# Altium PCB jetson_nano_breakout.PcbDoc
Units mil, origin at the board's own origin, x right, y up, seen from the top; angles counter-clockwise.
Board outline 2050 x 1337.5 mil, 2 copper layers (Top Layer, Bottom Layer); 35 components, 47 nets, 177 pads, 37 vias.
Unrouted connection lines stored in the file: 8.
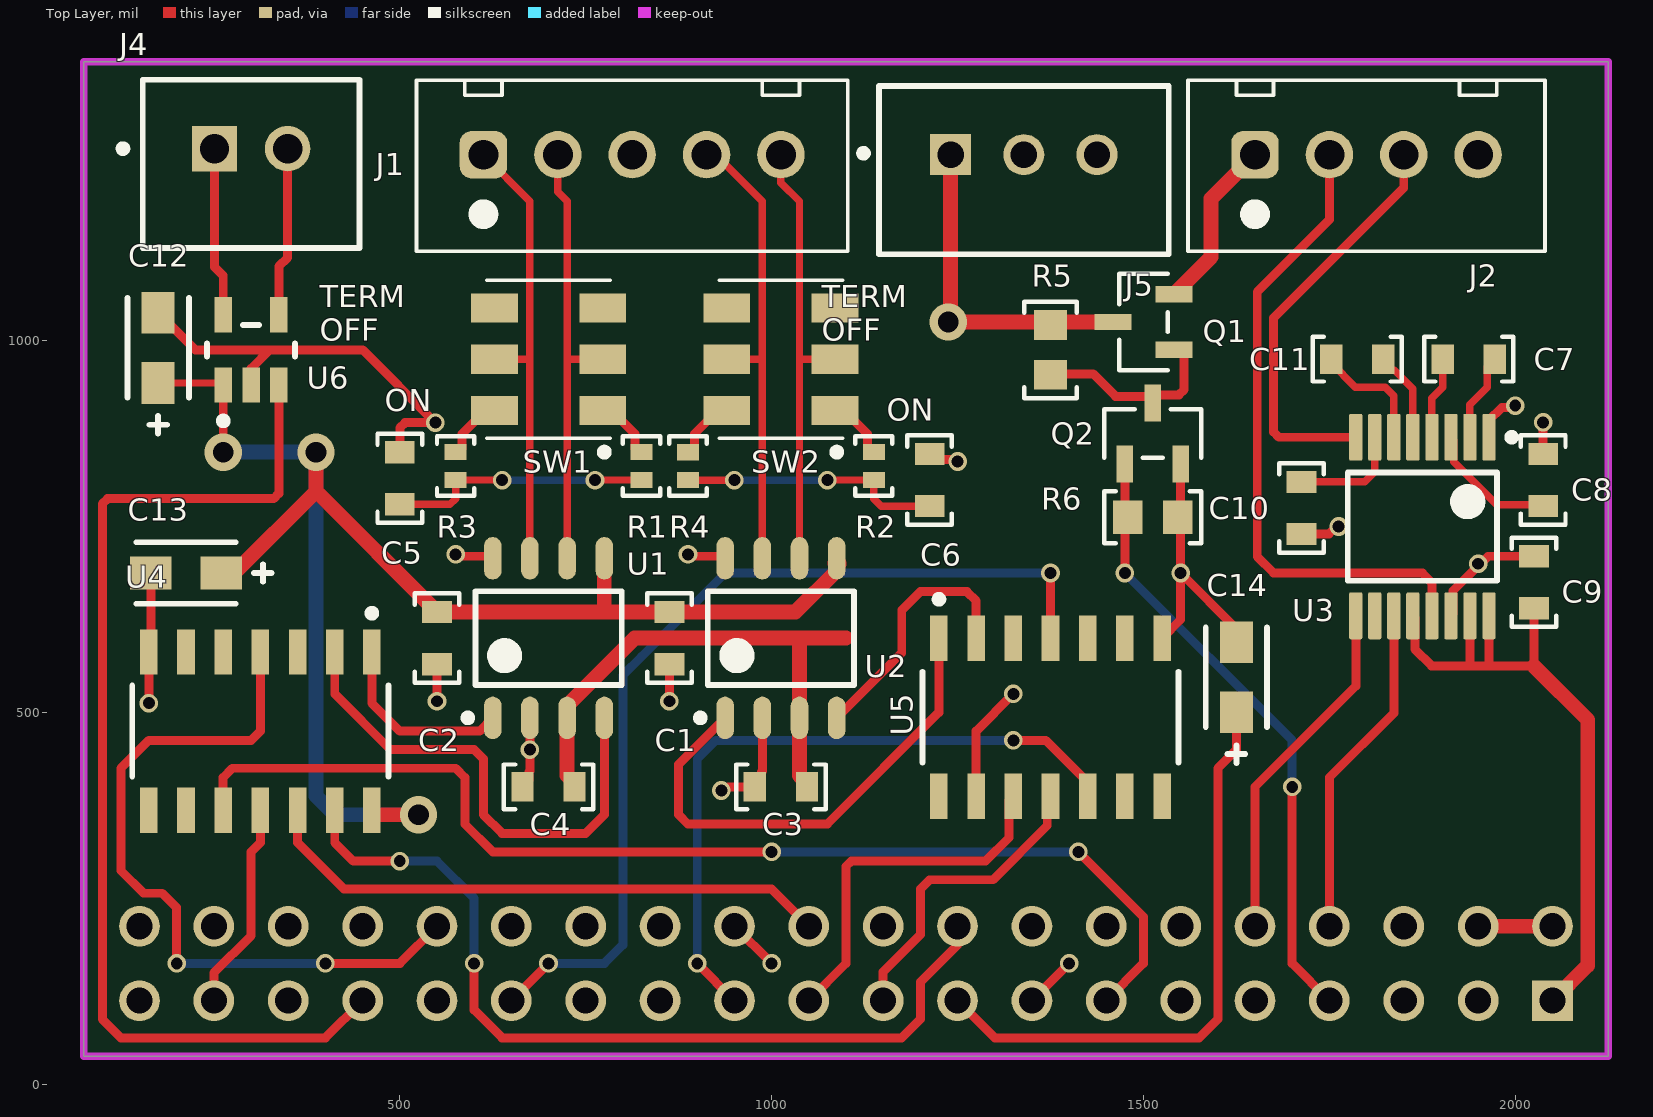
[diagram p0: Top Layer view]
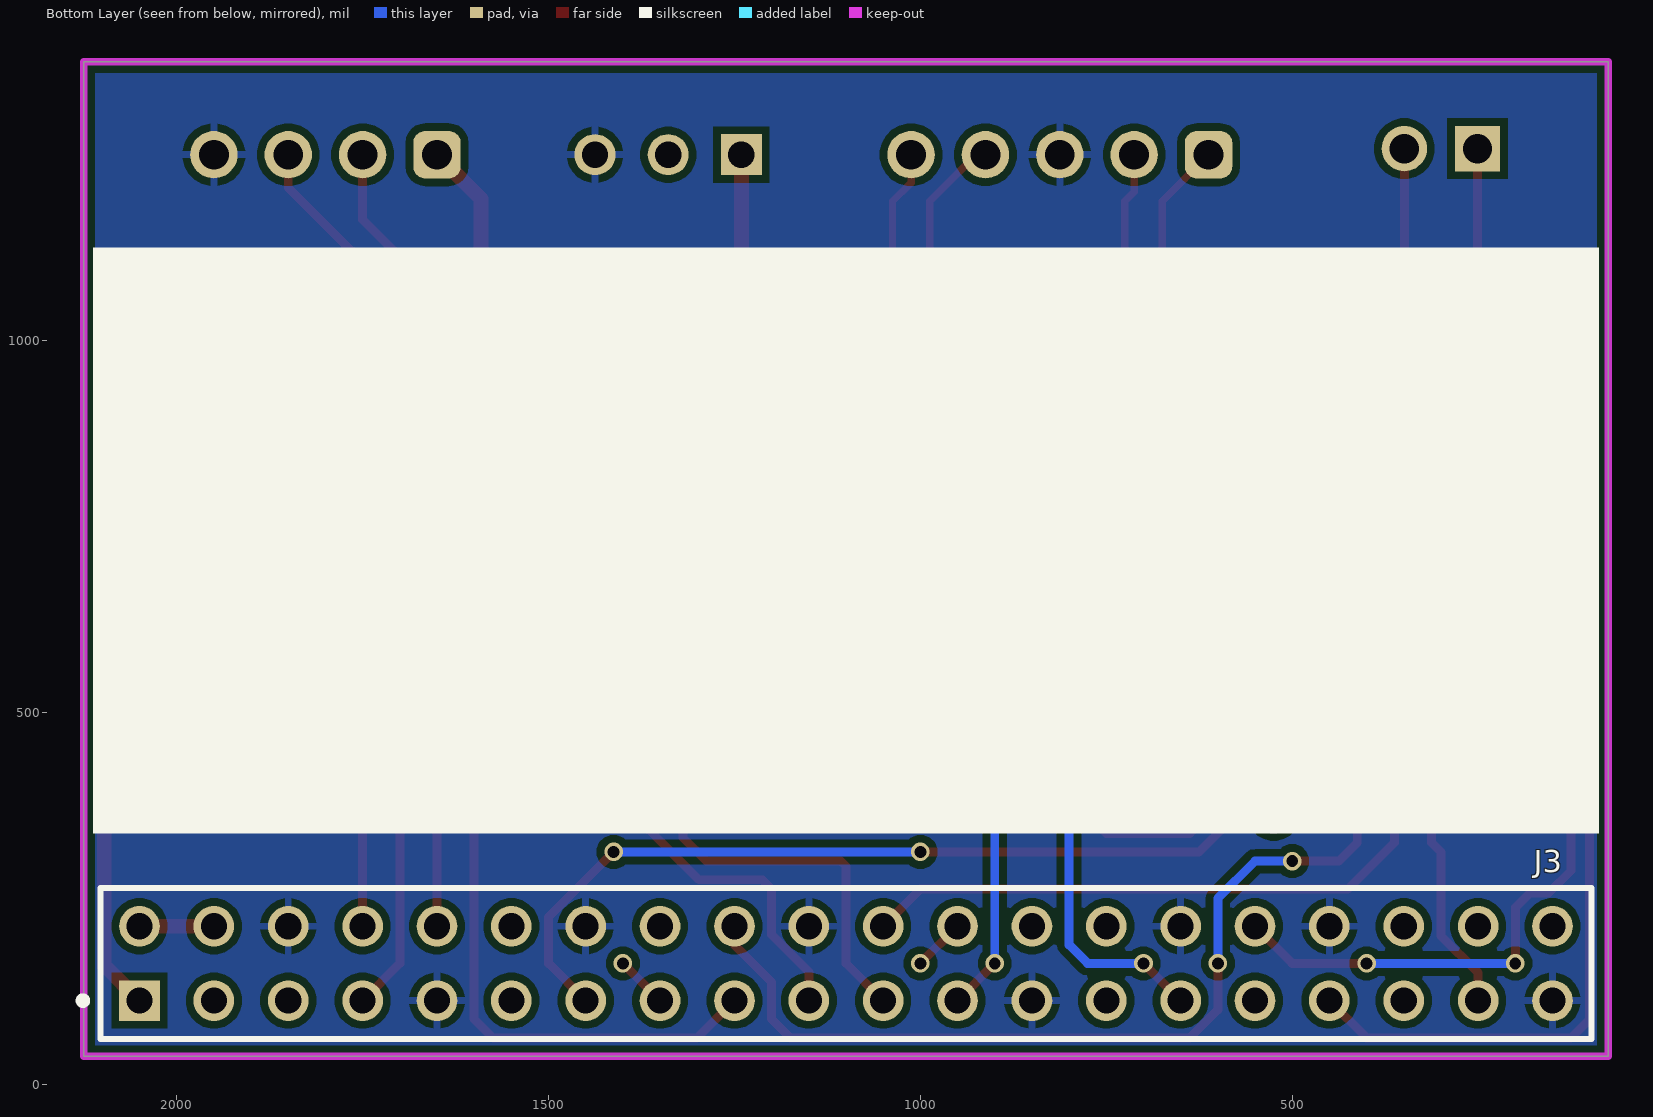
[diagram p1: Bottom Layer view, seen from below]
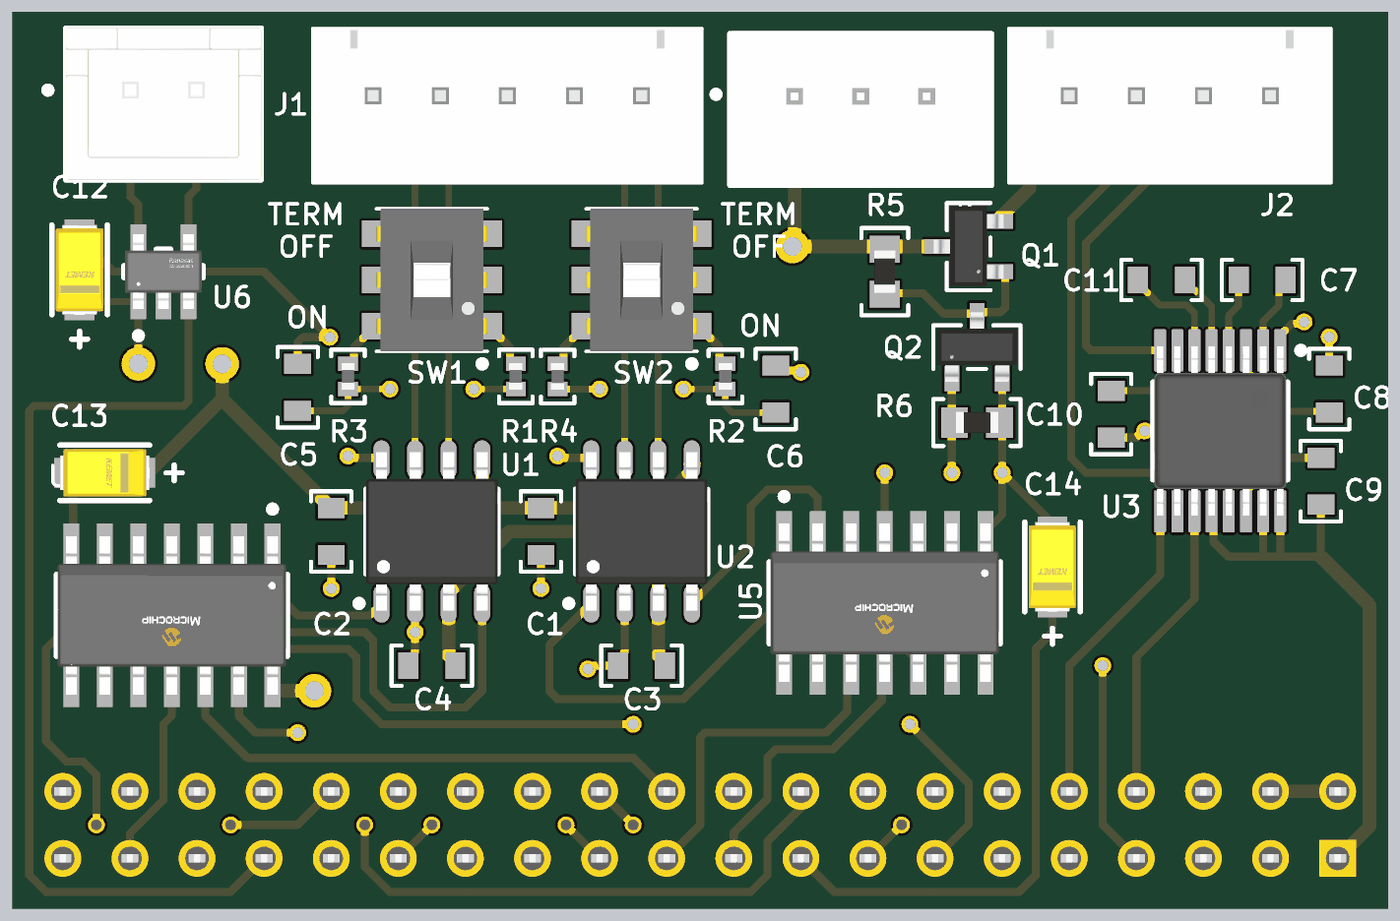
[diagram p2: 3D render of the assembled board from above, using the file's embedded part models]

## Layer stack, top to bottom
Top Solder: solder mask 0.4, Solder Resist, Dk 3.5
Top Layer: signal copper 1.4
Dielectric 1: dielectric 12.6, FR-4, Dk 4.8
Bottom Layer: signal copper 1.4
Bottom Solder: solder mask 0.4, Solder Resist, Dk 3.5

## Board outline
75,37.5 75,1375 2125,1375 2125,37.5

## Design rules (kind name [scope] priority, off if disabled: settings)
Clearance [All] p1: gap=10 ignorepadtopadclearanceinfootprint=FALSE except(0: Arc-Hole Track-Hole SMDPad-Hole THPad-Hole Via-Hole Fill-Hole Poly-Hole Region-Hole Text-Hole; 6: Arc-SMDPad Track-SMDPad SMDPad-SMDPad SMDPad-THPad SMDPad-Via SMDPad-Fill SMDPad-Poly SMDPad-Region)
MinimumSolderMaskSliver [All] p1: minsoldermaskwidth=7
PolygonConnect [All] p1: connectstyle=Relief reliefconductorwidth=10 reliefentries=4 polygonreliefangle="90 Angle" airgapwidth=10
RoomDefinition jetson_nano_breakout [InComponentClass('jetson_nano_breakout')] p1: confinementstyle=ConfineIn formatcopy=TRUE lockcomponents=FALSE outline 2175,112.5 4112.5,112.5 4112.5,625 2175,625
RoutingVias [All] p1: holewidth=16 width=25 viastyle="Through Hole" minholewidth=16 minwidth=20 maxholewidth=28 maxwidth=50
SilkToSolderMaskClearance [IsPad] p1: minsilkscreentomaskgap=5 clearancetoexposedcopper=TRUE
SolderMaskExpansion [All] p1: expansion=4 istentingtop=FALSE
SupplyNets "Schematic Supply Nets_2" [InNet('3v3')] p1: voltage=0.000
SupplyNets "Schematic Supply Nets_1" [InNet('+5')] p2: voltage=0.000
SupplyNets "Schematic Supply Nets" [InNet('GND')] p3: voltage=0.000
Width [All] p1: maxlimit=50 minlimit=10 preferedwidth=10
28 further rules are at their usual default settings.

## Components (designator, comment, footprint, x,y, rotation, side; value= is the part's Value field where it differs from the comment)
C1 "1uF Ceramic 16V" CAPACITOR_0603 862.5,600 r270 top value=1uF
C2 "1uF Ceramic 16V" CAPACITOR_0603 550,600 r270 top value=1uF
C3 "10uF Ceramic 6.3V" CAPACITOR_0603 1012.5,400 r180 top
C4 "10uF Ceramic 6.3V" CAPACITOR_0603 700,400 r180 top
C5 "10nF Ceramic 6.3V" CAPACITOR_0603 500,815 r270 top value=10nF
C6 "10nF Ceramic 6.3V" CAPACITOR_0603 1212.5,812.5 r270 top value=10nF
C7 "100nF Ceramic 6.3V" CAPACITOR_0603 1937.5,975 r180 top value=0.1uF
C8 "100nF Ceramic 6.3V" CAPACITOR_0603 2037.5,812.5 r90 top value=0.1uF
C9 "100nF Ceramic 6.3V" CAPACITOR_0603 2025,675 r90 top value=0.1uF
C10 "100nF Ceramic 6.3V" CAPACITOR_0603 1712.5,775 r270 top value=0.1uF
C11 "100nF Ceramic 6.3V" CAPACITOR_0603 1787.5,975 r180 top value=0.1uF
C12 "T491A104K035AT" FP-T491A104K035AT-MFG 175,990.26 r270 top
C13 "T491A104K035AT" FP-T491A104K035AT-MFG 212.5,687.5 r0 top
C14 "T491A104K035AT" FP-T491A104K035AT-MFG 1625,547.24 r270 top
J1 "XH2.54 VERT" CONN_JST_XH254_5POS_VERT 612.5,1250 r0 top
J2 "XH2.54 VERT" CONN_JST_XH254_4POS_VERT 1650,1250 r0 top
J3 "7-534206-0" FP-7-534206-0-MFG 1100,162.5 r180 bottom
J4 "B2B-XH-A(LF)(SN)" FP-B2B-XH-A_LF_SN-MFG 300,1237.5 r0 top
J5 "B3B-XH-A(LF)(SN)" FP-B3B-XH-A_LF_SN-MFG 1339.07,1229.33 r0 top
Q1 "MOSFET N-CH 30V 5.8A SOT-23-3" SOT-23-3 1500,1025 r90 top
Q2 "MOSFET N-CH 30V 5.8A SOT-23-3" SOT-23-3 1512.5,875 r0 top
R1 "60.4 Ohm 1% 1/16W" RESISTOR_0402 825,831.3 r270 top
R2 "60.4 Ohm 1% 1/16W" RESISTOR_0402 1137.5,831.3 r270 top
R3 "60.4 Ohm 1% 1/16W" RESISTOR_0402 575,831.3 r270 top
R4 "60.4 Ohm 1% 1/16W" RESISTOR_0402 887.5,831.2 r270 top
R5 "10k Ohm 5% 1/10W" RESISTOR_0603 1375,987.5 r270 top
R6 "10k Ohm 5% 1/10W" RESISTOR_0603 1512.5,762.5 r0 top
SW1 "Switch DPDT" CAS-220TA 700,975 r90 top
SW2 "Switch DPDT" CAS-220TA 1012.5,975 r90 top
U1 "CAN Transceiver" SOIC-8 700,600 r90 top
U2 "CAN Transceiver" SOIC-8 1012.5,600 r90 top
U3 "SN65C3221EPWR" PW0016A_M 1875,750 r270 top
U4 "MCP2517FD-H/SL" FP-C04-065-SL-MFG#1 312.5,475 r270 top
U5 "MCP2517FD-H/SL" FP-C04-065-SL-MFG#2 1375,493.7 r270 top
U6 "ISL3280EIHZ-T" FP-P5_064-MFG 300,987.5 r90 top

## Footprints (in the part's own frame and the unit in brackets; to place one, negate y for a bottom-side part, rotate by r counter-clockwise, add the part's x,y. Pads: shape width x height; smd on the part's side, far side on the other; paste and mask are expansions set on the pad)
CAPACITOR_0603 [mil] "CAPACITOR 0603"
  rect 30x40 smd: 1(-35,0) 2(35,0)
  silkscreen extent -60,-30 60,30, body extent -31,-16 32,16, height 31
CAS-220TA [mm] "SWITCH SLIDE DPDT 100MA 6V"
  rrect0% 1x1.6 smd: 1(-1.75,-1.85) 2(0,-1.85) 3(1.75,-1.85) 4(-1.75,1.85) 5(0,1.85) 6(1.75,1.85)
  silkscreen extent -3.3,-2.1 2.7,2.1, body extent -2.7,-2.1 2.7,2.1, height 2.51
CONN_JST_XH254_4POS_VERT [mm] "JST XH 2.54mm Pitch 4 Pos Vertical"
  rrect50% 1.62x1.62 hole 1.02: 1(0,0)
  round 1.62 hole 1.02: 2(2.54,0) 3(5.08,0) 4(7.62,0)
  silkscreen extent -2.29,-3.3 9.91,2.54, body extent -2.34,-3.35 9.96,2.49, height 7.21
CONN_JST_XH254_5POS_VERT [mm] "JST XH 2.54mm Pitch 5 Pos Vertical"
  rrect50% 1.62x1.62 hole 1.02: 1(0,0)
  round 1.62 hole 1.02: 2(2.54,0) 3(5.08,0) 4(7.62,0) 5(10.16,0)
  silkscreen extent -2.29,-3.3 12.45,2.54, body extent -2.34,-3.35 12.5,2.49, height 7.21
FP-7-534206-0-MFG [mm]
  rect 1.39x1.39 hole 0.89 paste-2539.97 mask+0: 1(-24.13,-1.27)
  round 1.39 hole 0.89 paste-2539.97 mask+0: 2(-24.13,1.27) 3(-21.59,-1.27) 4(-21.59,1.27) 5(-19.05,-1.27) 6(-19.05,1.27) 7(-16.51,-1.27) 8(-16.51,1.27) 9(-13.97,-1.27) 10(-13.97,1.27) 11(-11.43,-1.27) 12(-11.43,1.27) 13(-8.89,-1.27) 14(-8.89,1.27) 15(-6.35,-1.27) 16(-6.35,1.27) 17(-3.81,-1.27) 18(-3.81,1.27) 19(-1.27,-1.27) 20(-1.27,1.27) 21(1.27,-1.27) 22(1.27,1.27) 23(3.81,-1.27) 24(3.81,1.27) 25(6.35,-1.27) 26(6.35,1.27) 27(8.89,-1.27) 28(8.89,1.27) 29(11.43,-1.27) 30(11.43,1.27) 31(13.97,-1.27) 32(13.97,1.27) 33(16.51,-1.27) 34(16.51,1.27) 35(19.05,-1.27) 36(19.05,1.27) 37(21.59,-1.27) 38(21.59,1.27) 39(24.13,-1.27) 40(24.13,1.27)
  silkscreen extent -26.19,-2.58 25.47,2.58, body extent -25.4,-2.51 25.4,2.51, height 8.64
FP-B2B-XH-A_LF_SN-MFG [mm]
  rect 1.55x1.55 hole 1 paste-2539.97 mask+0: 1(-1.25,0.525)
  round 1.55 hole 1 paste-2539.97 mask+0: 2(1.25,0.525)
  silkscreen extent -4.5,-2.88 3.7,2.88, body extent -3.8,-2.98 3.8,2.98, height 0.25
FP-B3B-XH-A_LF_SN-MFG [mm]
  rect 1.4x1.4 hole 0.9 paste-2539.97 mask+0: 1(-2.5,0.525)
  round 1.4 hole 0.9 paste-2539.97 mask+0: 2(0,0.525) 3(2.5,0.525)
  silkscreen extent -5.6,-2.88 4.95,2.88, body extent -4.95,-2.88 4.95,2.89, height 7
FP-C04-065-SL-MFG#1 [mm]
  rect 1.55x0.6 smd paste+0 mask+0: 1(-2.7,3.81) 2(-2.7,2.54) 3(-2.7,1.27) 4(-2.7,0) 5(-2.7,-1.27) 6(-2.7,-2.54) 7(-2.7,-3.81) 8(2.7,-3.81) 9(2.7,-2.54) 10(2.7,-1.27) 11(2.7,0) 12(2.7,1.27) 13(2.7,2.54) 14(2.7,3.81)
  silkscreen extent -4.15,-4.38 1.55,4.38, body extent -3.57,-4.62 3.57,4.62, height 0.25
FP-C04-065-SL-MFG#2 [mm]
  rect 1.55x0.6 smd paste+0 mask+0: 1(-2.7,-3.81) 2(-2.7,-2.54) 3(-2.7,-1.27) 4(-2.7,0) 5(-2.7,1.27) 6(-2.7,2.54) 7(-2.7,3.81) 8(2.7,3.81) 9(2.7,2.54) 10(2.7,1.27) 11(2.7,0) 12(2.7,-1.27) 13(2.7,-2.54) 14(2.7,-3.81)
  silkscreen extent -4.15,-4.38 1.55,4.38, body extent -3,-4.33 3,4.33, height 1.75
FP-P5_064-MFG [mm]
  rect 1.2x0.6 smd paste+0 mask+0: 1(-1.2,0.95) 2(-1.2,0) 3(-1.2,-0.95) 4(1.2,-0.95) 5(1.2,0.95)
  silkscreen extent -2.55,-1.5 0.85,1.5, body extent -1.9,-1.6 1.9,1.6, height 0.25
FP-T491A104K035AT-MFG [mm]
  rect 1.42x1.13 smd paste+0 mask+0: 1(-1.2,0) 2(1.2,0)
  silkscreen extent -1.7,-1.05 2.93,1.05, body extent -2.03,-1.02 2.03,1.02, height 0.25
PW0016A_M [mm] "SOP, 16-Leads, Body 5.1x4.5mm, Pitch 0.65mm, IPC Low Density"
  rrect22% 1.6x0.45 smd: 1(-3.05,2.275) 2(-3.05,1.625) 3(-3.05,0.975) 4(-3.05,0.325) 5(-3.05,-0.325) 6(-3.05,-0.975) 7(-3.05,-1.625) 8(-3.05,-2.275) 9(3.05,-2.275) 10(3.05,-1.625) 11(3.05,-0.975) 12(3.05,-0.325) 13(3.05,0.325) 14(3.05,0.975) 15(3.05,1.625) 16(3.05,2.275)
  silkscreen extent -3.17,-2.55 1.85,3.17, body extent -3.21,-2.5 3.21,2.5, height 1
RESISTOR_0402 [mm] "Resistor 0402"
  rect 0.55x0.75 smd: 1(-0.475,0) 2(0.475,0)
  silkscreen extent -1.02,-0.64 1.02,0.64, body extent -0.5,-0.25 0.5,0.25, height 0.25
RESISTOR_0603 [mil] "Resistor 0603"
  rect 40x45 smd: 1(-33.5,0) 2(33.5,0)
  silkscreen extent -65,-35 65,35, body extent -31,-16 32,16, height 16
SOIC-8 [mm] "SOIC, 8-Leads, Body 4.90x3.90mm, Pitch 1.27mm, IPC Medium Density"
  oval 1.45x0.6 smd: 1(-2.725,1.905) 2(-2.725,0.635) 3(-2.725,-0.635) 4(-2.725,-1.905) 5(2.725,-1.905) 6(2.725,-0.635) 7(2.725,0.635) 8(2.725,1.905)
  silkscreen extent -2.85,-2.5 1.6,2.88, body extent -3,-2.5 3,2.5, height 1.75
SOT-23-3 [mil]
  rect 22x50 smd paste+0 mask+4: 1(-37.5,-41) 2(37.5,-41) 3(0,41)
  silkscreen extent -65,-33 65,33, body extent -60,-52 60,52, height 44

## Part data
C1 C2: library part CAPACITOR_1uF_0603, "Cap 1uF 16V +/-10% / Ceramic 0603", Supplier Part Number 1=399-7847-1-ND, Tolerance="+/- 10%", Voltage=16V, Made By="Flip B", Supplier 1=Digi-Key
C3 C4: library part CAPACITOR_10uF_0603, "Cap 10uF 6.3V +/-20% / Ceramic 0603", Supplier Part Number 1=1276-1119-1-ND, Tolerance="+/- 20%", Value (uF)="10 uF", Voltage=6.3V, ComponentLink1Description=Digikey, ComponentLink1URL=https://www.digikey.com/en/products/detail/samsung-electro-mechanics/CL10A106MQ8NNNC/3886777, Made By="Flip B", Supplier 1=Digi-Key
C5 C6: library part CAPACITOR_0.01uF_0603, "Cap 10nF 6.3V +/-20% / Ceramic 0603", Supplier Part Number 1=80-C0603C103K9R, Tolerance="+/- 10%", Voltage=6.3V, ComponentLink1Description=Datsheet, ComponentLink1URL=https://www.mouser.com/datasheet/2/212/KEM_C1002_X7R_SMD-1102033.pdf, Made By="Flip B", Supplier 1=Mouser
C7 C8 C9 C10 C11: library part CAPACITOR_0.1uF_0603, "Cap 100nF 6.3V +/-10% / Ceramic 0603", Supplier Part Number 1=399-15351-1-ND, Tolerance="+/- 10%", Voltage=6.3V, ComponentLink1Description=Datsheet, ComponentLink1URL=https://www.mouser.com/datasheet/2/212/KEM_C1002_X7R_SMD-1102033.pdf, Made By="Flip B", Supplier 1=Digi-Key
C12 C13 C14: library part CMP-03017-000018-1, "CAP TANT 0.1UF 10% 35V 1206", Capacitance=100nF, Case Code (Imperial)=1206, Case Code (Metric)=3216, Dielectric Material=Tantalum, ESR (Equivalent Series Resistance)=20R, Leakage Current=500nA, Max Operating Temperature=125°C, Min Operating Temperature=-55°C, Package Quantity=1, Ripple Current=61mA, Tolerance=10%, Voltage=35V, Case/Package=1206, Construction=Flat, Depth=1.6mm, Dissipation Factor=4%, Features="General Purpose", Height=1.6mm, Height - Seated (Max)=0.071inch, Lead Free="Lead Free", Lead Pitch=1.2mm, Length=3.2mm, Life (Hours)=2000Hour, Mount="Surface Mount", Number of Pins=2, Packaging="Tape and Reel", Polarity=Polar, Radiation Hardening=No, REACH SVHC="No SVHC", RoHS Compliant=Yes, Series=T491, Size=1.6mm, Termination=SMD/SMT, Voltage Rating=35V, Voltage Rating (DC)=35V, Weight=0.000571oz, Width=1.6mm
J1: library part CONN_JST_XH254_5POS_VERT, "JST XH 2.54mm Pitch 5 Pos Vertical", Color=White, Current Per Pin=4A, Manufacturer=JST, ComponentLink1Description="Purchase Link", ComponentLink1URL=https://www.amazon.com/460PCS-XH2-54-Connector-Terminal-Connectors/dp/B09DBGVX5C, Configuration=Vertical, Created by="Robert P", NOTE="Do not use JST 2.5mm parts with this footprint. JST does not make 2.54mm pitch pins, rather only clones make this connector!", Number of Positions=5, Pitch=2.54mm, Series="XH 2.54"
J2: library part CONN_JST_XH254_4POS_VERT, "JST XH 2.54mm Pitch 4 Pos Vertical", Color=White, Current Per Pin=4A, Manufacturer=JST, ComponentLink1Description="Purchase Link", ComponentLink1URL=https://www.amazon.com/460PCS-XH2-54-Connector-Terminal-Connectors/dp/B09DBGVX5C, Configuration=Vertical, Created by="Robert P", NOTE="Do not use JST 2.5mm parts with this footprint. JST does not make 2.54mm pitch pins, rather only clones make this connector!", Number of Positions=4, Pitch=2.54mm, Series="XH 2.54"
J3: library part CMP-03369-000068-1, "CONN RCPT 40POS 0.1 GOLD PCB", Current Rating=2A, Manufacturer="TE Connectivity", Temperature="-65°C to +105°C", Temperature Range High=+105°C, Temperature Range Low=-65°C, Voltage Rating=333V, Automotive=No, Category=Conn, ComponentLink2Description=Datasheet, ComponentLink2URL=https://octopart.com/datasheet/7-534206-0-te+connectivity-39516831, Conn Gender=Female, Conn Orientation=Vertical, Contact Material=Gold,Nickel, Device Class L1=Connectors, Device Class L2="Headers and Wire Housings", Device Class L3=unset, Digikey Description="CONN RCPT 40POS 0.1 GOLD PCB", Footprint Url=https://www.mouser.in/datasheet/2/418/NG_CD_534206_R7-1252933.pdf, Height=8.9mm, Is Female=yes, Lead Free=Yes, Manufacturer Part Number=7-534206-0, Mouser Description="Headers & Wire Housings REC 2X20P VRT T/H", Number of Contacts=40, Number of Rows=2, Octopart=https://octopart.com/7-534206-0-te+connectivity-39516831, Package=7-534206-0, Pitch=2.54mm, RoHS=TRUE, Standoff Height=0.38mm
J4: library part CMP-2000-05888-3, "CONN HEADER VERT 2POS 2.5MM", Color=Natural, Contact Resistance=20mR, Current Rating=3A, Housing Color=White, Insulation Resistance=1GR, Max Operating Temperature=85°C, Max Voltage Rating (AC)=250V, Min Operating Temperature=-25°C, Connector Type="Male Pin", Contact Material=Brass, Contact Plating=Tin, Contact Type="Male Pin", Depth=5.75mm, Fastening Type=Detent, Housing Material=Polyamide, Lead Free="Lead Free", Lead Pitch=2.5mm, Length=7.4mm, Max Current Rating=3A, Max Voltage Rating (DC)=250V, Mount="Through Hole", Number of Contacts=2, Number of Positions=2, Number of Rows=1, Orientation=Straight, Packaging=Bulk, Pitch=2.5mm, REACH SVHC="No SVHC", Series=XH, Termination=Solder, Voltage Rating=250V, Voltage Rating (AC)=250V, Wire/Cable Gauge=22AWG
J5: library part CMP-17439-000014-3, "CONN HEADER VERT 3POS 2.5MM", Color=Natural, Contact Resistance=20mR, Current Rating=3A, Flammability Rating="UL94 V-0", Housing Color=White, Insulation Resistance=1GR, Max Operating Temperature=85°C, Max Voltage Rating (AC)=250V, Min Operating Temperature=-25°C, Connector Type=Header, Contact Finish - Mating=TIN, Contact Material=Brass, Contact Plating=Tin, Contact Shape=Square, Contact Type="Male Pin", Depth=5.75mm, Fastening Type=Detent, Gender=Male, Housing Material=Polyamide, Insulation Color=Natural, Insulation Material=Nylon, Lead Free="Lead Free", Lead Pitch=2.5mm, Length=9.9mm, Max Current Rating=3A, Max Voltage Rating (DC)=250V, Mount="Through Hole", Number of Contacts=3, Number of Positions=3, Number of Rows=1, Orientation=Straight, Packaging=Bulk, Pitch=2.5mm, REACH SVHC="No SVHC", Series=XH, Termination=Solder, Voltage Rating=250V, Voltage Rating (AC)=250V, Wire/Cable Gauge=22AWG
Q1 Q2: library part AO3404A, "N-Channel 30 V 5.8A (Ta) 1.4W (Ta) Surface Mount SOT-23-3", Amp Rating="5.8 A", Package=SOT23-3L, Power Dissipation="1.4W (Ta)", Supplier Part Number 1=785-1004-1-ND, Created by="Dylan T", FET Type=N-Channel, Manufacturer _Part_Number=AO3404A, Rds (on)="28mOhm @ 5.8A, 10V", SourceLibrary=ON_Semiconductor_2020-01-13, Supplier 1=Digi-Key, Vdss=30V, Vendor="Alpha & Omega Semiconductor Inc.", Vgs (Max)="3V @ 5.8A, 10V", Vgs (th)="3V @ 250µA"
R1 R2 R3 R4: library part RESISTOR_60.4_0402, "RES 60.4 OHM 1% 1/16W 0402", Digikey Part Numer=CR0603-JW-104ELFTR-ND, Supplier Part Number 1=13-AC0402FR-0760R4LCT-ND, Tolerance="+/- 1%", Value  (Ohms)=60.4, Made By="Robert Pafford", Supplier=Digikey, Supplier 1=Digi-Key, Wattage=1/16W
R5 R6: library part RESISTOR_10K_0603, "RES 10k OHM 5% 1/10W 0603", Digikey Part Numer=CR0603-JW-104ELFTR-ND, Supplier Part Number 1=2019-RK73B1JTTD103JCT-ND, Tolerance="+/- 5%", Value  (Ohms)=10K, ComponentLink1Description=Datasheet, ComponentLink1URL=https://www.bourns.com/docs/product-datasheets/CRxxxxx.pdf, Made By="Robert Pafford", Supplier=Digikey, Supplier 1=Digi-Key, Wattage=1/8W
SW1 SW2: library part CAS-220TA_CAN_TERM, "GOLD SWITCH FLUSH SLIDE DPDT 100MA 6V", Current Rating="100 mA", Supplier Part Number 1=CAS220JCT-ND, Voltage Rating=6VDC, Contact Finish=Gold, Made By="Robert Pafford", Supplier 1=Digi-Key, Switch Function=DPDT
U1 U2: library part TJA1442AT, "CAN Interface IC High-Speed CAN Transceiver with Standby Mode", Supplier Part Number 1=771-TJA1442AT/0Z, Made By="Robert Pafford", Max Data Rate=5Mbps, Supplier 1=Mouser
U3: library part CMP-0299-01595-2, "3-V to 5.5-V Single-Channel RS-232 1-Mbit/s Line Driver / Receiver with ±15-kV IEC ESD Protection, -40 to 85 degC, 16-Pin SSOP (DB), Green (RoHS & no Sb/Br)", Drivers Per Package=1, Supply Voltage(s)(V)="3.3 or 5.0", ComponentLink1Description="Manufacturer URL", ComponentLink1URL=www.ti.com, ComponentLink2Description=Datasheet, ComponentLink2URL=http://www.ti.com/general/docs/lit/getliterature.tsp?genericPartNumber=SN65C3221E&fileType=pdf, ComponentLink3Description="Package Specification", ComponentLink3URL=http://www.ti.com/litv/pdf/mpds361, DatasheetVersion=SLLS694B, ESD HBM(kV)=+/-15, ICC(Max)(mA)=1, IEC-61000-4-2 SUPPORT=TRUE, PackageDescription="16-Pin Plastic Thin Small Outline Package 5 x 4.4 mm Body ,0.65 mm Pitch", PackageReference=PW0016A, PackageVersion="revG, Feb-2011", Receivers Per Package=1, RS-232=TRUE, Single Supply=TRUE, SubFamily=RS-232
U4 U5: library part CMP-06298-000003-1, "IC CANBUS CONTROLLER SPI 14SOIC", Ambient Temperature Range High=+150°C, Ambient Temperature Range Low=-40°C, Manufacturer=Microchip, Max Junction Temp=+165°C, Max Supply Voltage=5.5V, Min Supply Voltage=2.7V, Nominal Supply Current=15mA, Package=C04-065-SL, Temperature="-40°C to +150°C", Automotive=No, Category=IC, ComponentLink2Description=Datasheet, ComponentLink2URL=http://ww1.microchip.com/downloads/en/DeviceDoc/MCP2517FD-External-CAN-FD-Controller-with-SPI-Interface-20005688B.pdf, Device Class L1="Integrated Circuits (ICs)", Device Class L2="Interface ICs", Device Class L3=Controllers, Digikey Description="IC CANBUS CONTROLLER SPI 14SOIC", Footprint Url=http://ww1.microchip.com/downloads/en/DeviceDoc/14L%20SOIC%203_90%20mm%20%28SL%29%20C04-00065d.pdf, Function=Controller, Height=1.75mm, Interface=SPI,CAN, Ipc Land Pattern Name=SOIC127P600X175-14, Lead Free=Yes, Manufacturer Part Number=MCP2517FD-H/SL, Mouser Description="Stand-Alone Can Fd Controller w/Spi Interface, 14 Soic .150in Tube", Octopart=https://octopart.com/mcp2517fd-h%2Fsl-microchip-83497369, RoHS=TRUE, Standoff Height=0.1mm, Temperature Range High=+150°C, Temperature Range Low=-40°C
U6: library part CMP-13518-000001-1, "IC RCVR ESD RS485/422 LP SOT23-5", Manufacturer=Renesas, Max Junction Temp=+150°C, Max Supply Voltage=5.5V, Min Supply Voltage=3V, Nominal Supply Current=400uA, Package=P5.064, Temperature="-40°C to +85°C", Temperature Range High=+85°C, Temperature Range Low=-40°C, Automotive=No, Category=IC, ComponentLink2Description=Datasheet, ComponentLink2URL=https://www.renesas.com/us/en/www/doc/datasheet/isl3280e-81e-82e-83e-84e-85e.pdf, Data Rate=20Mbits/s, Device Class L1="Integrated Circuits (ICs)", Device Class L2="Interface ICs", Device Class L3="RS-232 / RS-422 / RS-485 Interface ICs", Digikey Description="IC RCVR ESD RS485/422 LP SOT23-5", Height=1.45mm, Interface=RS-485,RS-422, Ipc Land Pattern Name=SOT95P280X118-5, Lead Free=Yes, Manufacturer Part Number=ISL3280EIHZ-T, Mouser Description="ISL3280E Series 20 Mbps ±16.5 kV Surface Mount RS-485/RS-422 Receiver - SOT-23-5", Number Of Receivers=1, Octopart=https://octopart.com/isl3280eihz-t-renesas-88254858, RoHS=TRUE, Simplex Duplex=Simplex, Standoff Height=0mm

## Via types
v1: diameter 25, hole 16, Top Layer to Bottom Layer, 33 vias
v2: diameter 50, hole 28, Top Layer to Bottom Layer, 4 vias

## Nets (pads, with @x,y where several pads share a name; then routed paths per layer and width w, separated by ;. In a path a pad name is that pad's centre, name@x,y a point inside that pad or via, vN(x,y) a via of type N, cw(c..) or ccw(c..) an arc to the next point about the centre after c; other vN are vias at no path point)
3v3: C1.1 C2.1 C9.1 C12.2 C13.2 C14.2 J3.1 J3.17 U1.5 U2.5 U3.12 U3.15 U3.16 U4.14 U5.14 U6.1 | length 3714.2
  Top Layer w12: v2@262.6,850.1 U6.1 ; J3.17 1300,62.5 1575,62.5 1600,87.5 1600,425 1625,450 C14.2 ; U3.12 1865.06,627.06 1865.06,584.94 1887.5,562.5 1937.5,562.5 ; U3.15 1938.98,563.98 1937.5,562.5 ; U3.16 1964.57,564.57 1962.5,562.5 ; C9.1 2025,562.5 1962.5,562.5 ; 1937.5,562.5 1962.5,562.5
  Top Layer w20: C13.2@277.5,687.5 387.5,797.5 ; v2(387.5,850) 387.5,797.5 ; U4.14 462.5,364.31 464.31,362.5 v2(525,362.5) ; U1.5 775,635 ; U2.5 1087.5,700.69 1087.5,690.55 1031.95,635 C1.1 775,635 ; 2025,562.5 2097.36,490.14 2097.36,159.86 J3.1 ; 387.5,797.5 C2.1 775,635
  Top Layer w25: U2.5@1087.5,700.69 U2.5@1088.19,700
  Bottom Layer w20: v2(262.5,850) v2(387.5,850) 387.5,387.5 412.5,362.5 v2(525,362.5)
+5: C3.1 C4.1 J3.2 J3.4 J5.1 Q1.3 R5.1 U1.3 U2.3 | length 1288.4
  Top Layer w20: C4.1@735,395 C4.1 ; C4.1@735,405 725,415 U1.3 725,509.45 815.55,600 1037.5,600 ; C3.1@1052.46,395.04 C3.1 1047.5,405 1037.5,415 U2.3 1037.5,600 ; 1100,600 1037.5,600 ; J5.1 1240.65,1028.15 v2(1237.5,1025) 1371,1025 R5.1 1379,1025 Q1.3 ; J3.4 J3.2
can0_din: U2.4 U5.2 | length 346.6
  Top Layer w12: U2.4 1175,580.22 1175,637.5 1200,662.5 1262.5,662.5 1275,650 U5.2
can0_dout: U2.1 U5.1 | length 691.1
  Top Layer w10: U2.1@937.5,475 U2.1
  Top Layer w12: U2.1 875,430.22 875,362.5 887.5,350 1075,350 1225,500 U5.1
can1_din: U1.4 U4.2 | length 681
  Top Layer w12: U4.2 412.5,525 487.5,450 600,450 612.5,437.5 612.5,362.5 637.5,337.5 750,337.5 775,362.5 U1.4
can1_dout: U1.1 U4.1 | length 254.2
  Top Layer w12: U4.1 462.5,512.5 500,475 607.28,475 U1.1
GND: C1.2 C2.2 C3.2 C4.2 C5.1 C6.1 C8.2 C9.2 C10.2 C12.1 C13.1 C14.1 J1.3 J2.4 J3.6 J3.9 J3.14 J3.20 J3.25 J3.30 J3.34 J3.39 J5.3 Q2.2 R6.2 U1.2 U1.8 U2.2 U2.8 U3.1 U3.14 U4.7 U5.7 U6.2 | length 1904.9
  Top Layer w12: v1(162.5,512.5) U4.7 ; U4.7@165.26,584.06 C13.1 ; C12.1 225,987.5 237.5,987.5 325,987.5 ; U6.2 300,962.5 325,987.5 ; C5.1 500,882.63 507.03,889.66 v1(547.84,889.66) 450,987.5 325,987.5 ; v1(550,515) C2.2 ; v1(575,712.5) 577.49,710.01 622.27,710.01 U1.8 ; C4.2 674,409 674,420.03 675,421.03 v1(675,450) ; v1@675,446.97 v1(675,450) ; U1.2 v1(675,450) ; v1(862.5,515) C1.2 ; v1(887.5,712.5) 889.99,710.01 934.77,710.01 U2.8 ; v1(932.5,395) 936.02,395 941.02,400 C3.2 986.5,409 986.5,420.03 987.5,421.03 U2.2 ; C6.1 1220.01,839.99 1247.51,839.99 v1(1250,837.5) ; U5.7 1550,625 v1(1550,687.5) ; R6.2 R6.2@1550,766.5 ; Q2.2@1553.75,816.25 1551.25,816.25 1550,815 R6.2@1550,766.5 ; C14.1@1625,612.5 v1(1550,687.5) ; C10.2 1749.47,740 1759.47,750 v1(1762.5,750) ; U3.14 1916.24,632.78 1916.24,663.37 v1@1951.44,698.56 ; v1(1950,700) 1953.52,700 1963.52,710 C9.2 ; U3.1 1964.57,892.72 1981.86,910.01 1997.51,910.01 v1(2000,912.5) ; C8.2 v1(2037.5,890) ; v1(1550,687.5) R6.2@1550,766.5
GPIO01: J3.29 U5.4 | length 1263
  Top Layer w12: J3.29 v1(700,162.5) ; U5.4 v1(1375,687.5)
  Bottom Layer w12: v1(700,162.5) 775,162.5 800,187.5 800,197.21 800,212.5 800,550 825,575 937.5,687.5 975,687.5 v1(1375,687.5)
GPIO07: J3.32 U4.4 | length 993.4
  Top Layer w12: v1(200,162.5) 200,237.5 180.59,256.91 155.59,256.91 125,287.5 125,425 162.5,462.5 300,462.5 312.5,475 U4.4 ; v1(400,162.5) 500,162.5 J3.32
  Bottom Layer w12: v1(200,162.5) v1(400,162.5)
GPIO09: J3.7 Q2.1 R6.1 | length 841.1
  Top Layer w12: v1(1475,687.5) R6.1@1475,766.5 ; Q2.1 R6.1@1475,766.5 ; R6.1 R6.1@1475,766.5 ; v1(1700,400) 1700,162.5 J3.7
  Bottom Layer w12: v1(1475,687.5) 1700,462.5 v1(1700,400)
GPIO11: J3.31
GPIO12: J3.15 J5.2 | length 70.7
  Top Layer w12: J3.15 v1(1400,162.5)
GPIO13: J3.33 U6.3 | length 1463
  Top Layer w12: U6.3 337.4,794.53 330.37,787.5 107.03,787.5 100,780.47 100,575 100,87.5 125,62.5 400,62.5 J3.33
NetC5_2: C5.2 R1.2 R3.2 | length 353.3
  Top Layer w10: C5.2 567.5,780 575,787.5 R3.2 575.05,812.55 v1(637.5,812.5) v1(637.5,812.5) ; v1(762.5,812.5) v1(762.5,812.5) 824.95,812.55 R1.2
  Bottom Layer w10: v1(637.5,812.5) v1(762.5,812.5)
NetC6_2: C6.2 R2.2 R4.2 | length 350.3
  Top Layer w10: R4.2@891.44,812.5 v1(950,812.5) ; v1(1075,812.5) v1(1075,812.5) 1137.45,812.55 R2.2 1137.5,787.5 1147.5,777.5 C6.2
  Bottom Layer w10: v1(950,812.5) v1(1075,812.5)
NetC7_1: C7.1 U3.2 | length 118.8
  Top Layer w10: U3.2 1938.98,913.98 1962.5,937.5 1962.5,965 C7.1
NetC7_2: C7.2 U3.4 | length 111
  Top Layer w10: U3.4 1887.8,922.49 1902.5,937.19 C7.2
NetC8_1: C8.1 U3.3 | length 179.6
  Top Layer w10: U3.3 1917.24,866.22 1917.24,837.04 1975,779.29 2035.71,779.29 C8.1
NetC10_1: C10.1 U3.7 | length 150.7
  Top Layer w10: C10.1 1797.5,810 1811.02,823.52 U3.7
NetC11_1: C11.1 U3.5 | length 124.3
  Top Layer w10: C11.1 1822.5,970 1832.5,960 1837.5,960 1862.2,935.3 U3.5
NetC11_2: C11.2 U3.6 | length 163.2
  Top Layer w10: C11.2 1752.5,970 1785,937.5 1825,937.5 1836.61,925.89 U3.6
NetJ1_1: J1.1 SW1.5 U1.7 | length 616.4
  Top Layer w10: J1.1 675,1187.5 675,975 ; SW1.5 675,975 ; U1.7 675,975
NetJ1_2: J1.2 SW1.2 U1.6 | length 595.7
  Top Layer w10: J1.2 712.5,1200 725,1187.5 725,975 ; U1.6 725,975 ; SW1.2 725,975
NetJ1_4: J1.4 SW2.5 U2.7 | length 628.9
  Top Layer w10: J1.4 925,1250 987.5,1187.5 987.5,975 ; SW2.5 987.5,975 ; U2.7 987.5,975
NetJ1_5: J1.5 SW2.2 U2.6 | length 600.9
  Top Layer w10: J1.5 1012.5,1212.5 1037.5,1187.5 1037.5,975 ; U2.6 1037.5,975 ; SW2.2 1037.5,975
NetJ2_1: J2.1 Q1.2 | length 232.6
  Top Layer w20: Q1.2 1591,1112.5 1591,1191 J2.1
NetJ2_2: J2.2 U3.13 | length 874.7
  Top Layer w12: J2.2 1750,1162.5 1653,1065.5 1653,1015.5 1653,709.5 1675,687.5 1875,687.5 1887.8,674.7 U3.13
NetJ2_3: J2.3 U3.8 | length 558.7
  Top Layer w12: U3.8 1682.03,870.08 1675,877.11 1675,1005.49 1675,1030.49 1850,1205.49 J2.3
NetJ4_1: J4.1 U6.5 | length 228.3
  Top Layer w12: J4.1 250.79,1099.21 262.6,1087.4 U6.5
NetJ4_2: J4.2 U6.4 | length 228.3
  Top Layer w12: U6.4 337.4,1099.9 349.21,1111.71 J4.2
NetQ1_1: Q1.1 Q2.3 R5.2 | length 272.3
  Top Layer w12: R5.2@1372.14,955.14 1432.36,955.14 1462.5,925 Q2.3@1507.5,925 ; Q1.1 1549.73,987.5 1554.73,982.5 1554.73,934.01 1547.7,926.99 1512.5,926.99 Q2.3@1512.5,920 ; Q2.3@1512.5,920 Q2.3 Q2.3@1512.5,920
NetR1_1: R1.1 SW1.1 | length 86.9
  Top Layer w12: SW1.1 784.65,906.1 816.24,874.51 816.24,854.83 821.06,850 R1.1
NetR2_1: R2.1 SW2.1 | length 86.9
  Top Layer w12: SW2.1 1097.15,906.1 1128.74,874.51 1128.74,854.83 1133.56,850 R2.1
NetR3_1: R3.1 SW1.4 | length 86.9
  Top Layer w12: R3.1 578.94,850 583.76,854.83 583.76,874.51 615.35,906.1 SW1.4
NetR4_1: R4.1 SW2.4 | length 87
  Top Layer w12: R4.1 891.44,849.9 896.26,854.73 896.26,874.51 927.85,906.1 SW2.4
SPI0_CS0: J3.24 U5.13 | length 229
  Top Layer w12: J3.24 v1(1000,162.5) ; U5.13 1275,475 v1(1325,525)
SPI0_CS1: J3.26
SPI0_MISO: J3.21 U5.12 | length 494.5
  Top Layer w12: J3.21 1100,162.5 1100,292.97 1107.03,300 1287.5,300 1319.19,331.69 1319.19,381.59 U5.12
SPI0_MOSI: J3.19 U5.11 | length 418
  Top Layer w12: J3.19 1150,151.18 1200,201.18 1200,262.5 1212.5,275 1297.71,275 1370.67,347.96 1370.67,383.07 U5.11
SPI0_SCK: J3.23 U5.10 | length 923.1
  Top Layer w12: v1(900,162.5) J3.23 ; v1(1325,462.5) 1368.6,462.5 1425,406.1 U5.10
  Bottom Layer w12: v1(900,162.5) 900,437.5 925,462.5 v1(1325,462.5)
SPI1_CS0: J3.18 U4.13 | length 1158.9
  Top Layer w12: U4.13 412.5,325 437.5,300 v1(500,300) ; v1(600,162.5) 600,100 637.5,62.5 1175,62.5 1200,87.5 1200,137.5 J3.18@1250,187.5
  Bottom Layer w12: v1(500,300) 550,300 600,250 v1(600,162.5)
SPI1_CS1: J3.16
SPI1_MISO: J3.22 U4.12 | length 777.8
  Top Layer w12: U4.12 362.5,325 425,262.5 1000,262.5 J3.22
SPI1_MOSI: J3.37 U4.11 | length 282.1
  Top Layer w12: J3.37 250,150 300,200 300,312.5 312.5,325 U4.11
SPI1_SCK: J3.13 U4.10 | length 1539.1
  Top Layer w12: U4.10 262.5,412.5 275,425 575,425 587.5,412.5 587.5,350 625,312.5 v1(1000,312.5) ; v1(1412.5,312.5) 1500,225 1500,162.5 J3.13
  Bottom Layer w12: v1(1000,312.5) v1(1412.5,312.5)
uart_rx: J3.10 U3.9 | length 473.6
  Top Layer w12: J3.10 1650,400 1785.59,535.59 1785.59,629.76 U3.9
uart_tx: J3.8 U3.11 | length 457.3
  Top Layer w12: J3.8 1750,412.5 1836.61,499.11 U3.11 U3.11@1833.76,627.06
pads on no net: J3.3 J3.5 J3.11 J3.12 J3.27 J3.28 J3.35 J3.36 J3.38 J3.40 SW1.3 SW1.6 SW2.3 SW2.6 U3.10 U4.3 U4.5 U4.6 U4.8 U4.9 U5.3 U5.5 U5.6 U5.8 U5.9
copper on no net: | length 167.9
  Top Layer w10: 175,943.01 259.84,943.01 ; 259.74,687.5 277.5,687.5 ; 1250,187.5 1250,212.5 ; 1371,1025 1373,1023 ; 1625,594.49 1625,612.5 ; 1850,1230.49 1850,1250

## Polygon pours and split planes (outlines as drawn)
GND on Bottom Layer "GND_L02_P000" (solid, pour order 0): 87.5,1362.5 87.5,50 2112.5,50 2112.5,1362.5

## Keep-outs
Keep-Out Layer:
  the board outline again, w10

## Silkscreen, mask and mechanical layers (free items; w line width, h text height)
Top Overlay:
  drawing of 19 lines, arcs and shapes, not listed
  text "Jetson AGX Breakout / REV 1.1.1" at 1375.05,1437.5 h30
  text "TERM / OFF" at 392.54,1000 h30
  text "TERM / OFF" at 1067.54,1000 h30
  text "ON" at 480,905 h30
  text "ON" at 1155,892.5 h30
Bottom Overlay:
  rectangle: 87.5,337.5 2112.5,1125